# Altium PCB CSM32RV20_QFN_3V5V_V1.1.PcbDoc
Units mm, origin at the board's own origin, x right, y up, seen from the top; angles counter-clockwise.
Board outline 67.31 x 29.21 mm, 2 copper layers (Top Layer, Bottom Layer); 39 components, 51 nets, 196 pads, 173 vias.
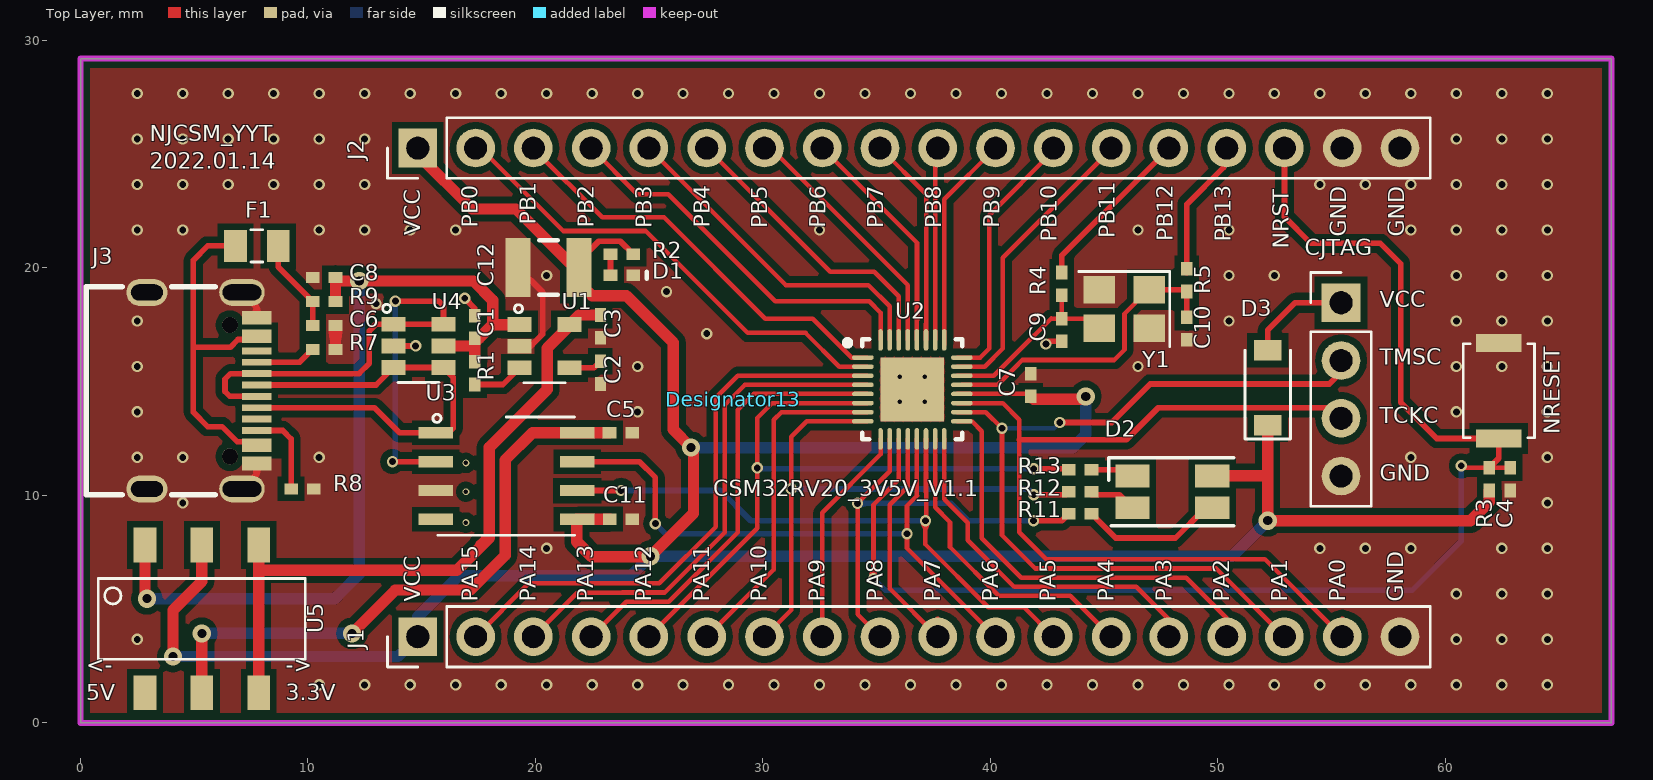
[diagram p0: Top Layer view]
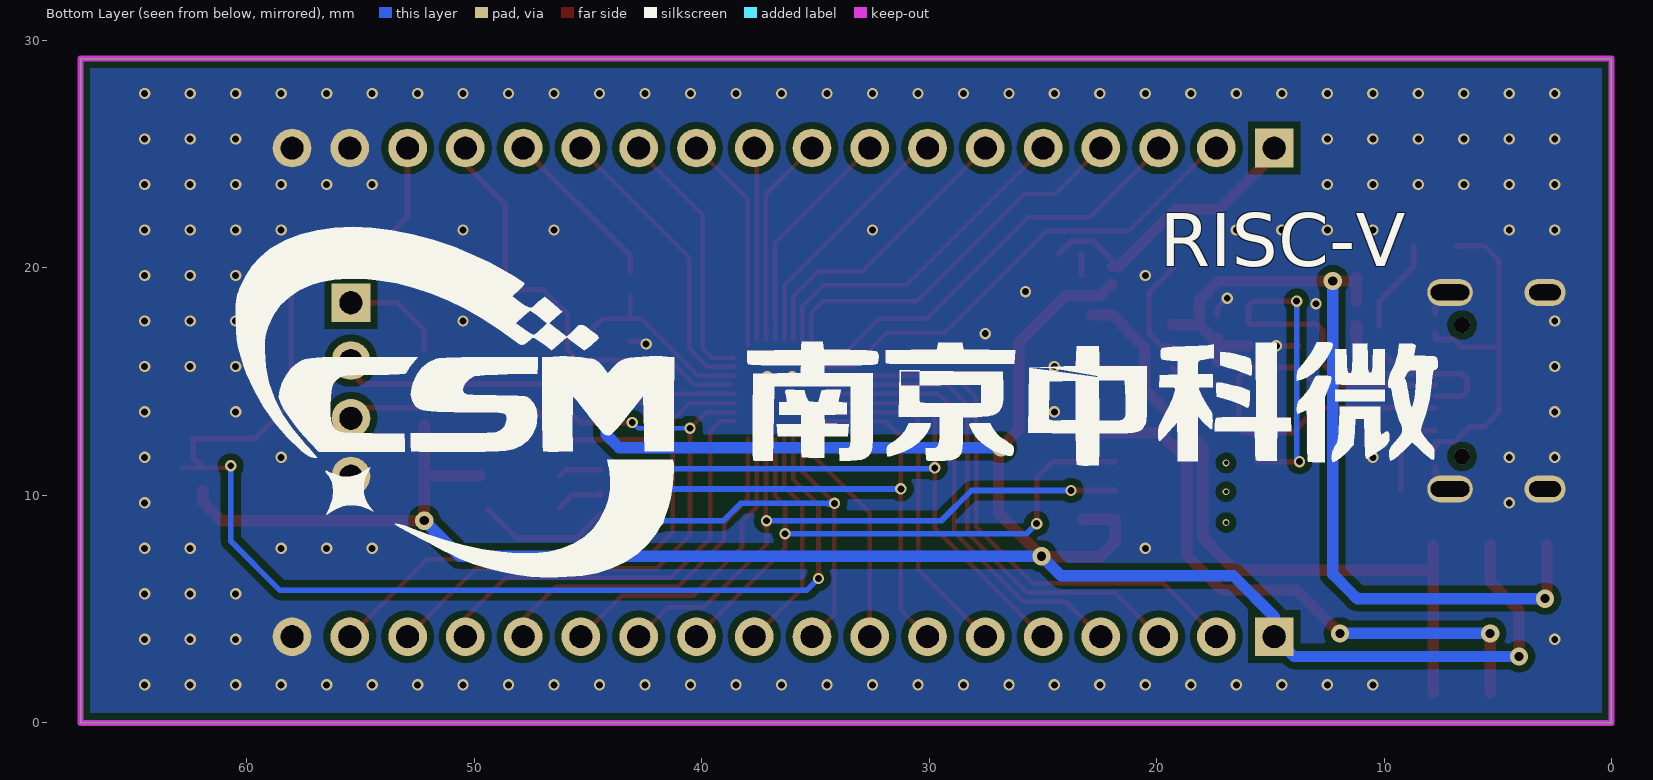
[diagram p1: Bottom Layer view, seen from below]

## Layer stack, top to bottom
Top Solder: solder mask 0.0102, Solder Resist, Dk 3.5
Top Layer: signal copper 0.0356
Dielectric1: dielectric 0.32, FR-4, Dk 4.8
Bottom Layer: signal copper 0.0356
Bottom Solder: solder mask 0.0102, Solder Resist, Dk 3.5

## Board outline
0,0 67.31,0 67.31,29.21 0,29.21

## Design rules (kind name [scope] priority, off if disabled: settings)
Clearance [All] p1: gap=0.2 ignorepadtopadclearanceinfootprint=TRUE except(0: Arc-Hole Track-Hole SMDPad-Hole THPad-Hole Via-Hole Fill-Hole Poly-Hole Region-Hole Text-Hole; 0.3: Arc-Fill Arc-Poly Arc-Region Track-Fill Track-Poly Track-Region SMDPad-Fill SMDPad-Poly SMDPad-Region THPad-Fill THPad-Poly THPad-Region Via-Fill Via-Poly Via-Region Fill-Fill Fill-Poly Fill-Region Poly-Poly Poly-Region Region-Region)
ComponentClearance [All] p1: gap=0.127 collisioncheckmode=3 verticalgap=0.254 showdistances=FALSE
DiffPairsRouting [All] p1: maxlimit=0.254 minlimit=0.15 mostfreqgap=0.254 toplayer_minwidth=0.2 toplayer_maxwidth=1 toplayer_prefwidth=0.2 bottomlayer_minwidth=0.2 bottomlayer_maxwidth=1 bottomlayer_prefwidth=0.2 maxuncoupledlength=12.7
MinimumSolderMaskSliver [All] p1: minsoldermaskwidth=0
PolygonConnect [All] p1: connectstyle=Direct reliefconductorwidth=0.254 reliefentries=4 polygonreliefangle="90 Angle" airgapwidth=0.254
RoutingCorners [All] p1: cornerstyle=45-Degree minsetback=0.2 maxsetback=2.54
RoutingVias [All] p1: holewidth=0.711 width=1.27 viastyle="Through Hole" minholewidth=0.2 minwidth=0.3 maxholewidth=0.711 maxwidth=1.27
SilkToSilkClearance [All] p1: silktosilkclearance=0.01
SilkToSolderMaskClearance [IsPad] p1: minsilkscreentomaskgap=0.01 clearancetoexposedcopper=TRUE
SolderMaskExpansion [All] p1: expansion=0.102
UnRoutedNet [All] p1: checkbadconnections=TRUE
Width [All] p1: maxlimit=0.5 minlimit=0.2 preferedwidth=0.25 minimp=50.000000 maximp=50.000000 favimp=50.000000
23 further rules are at their usual default settings.

## Components (designator, comment, footprint, x,y, rotation, side; value= is the part's Value field where it differs from the comment)
C1 "1uF" 0402 17.336,17.408 r90 top
C2 "22nF" 0402 22.86,15.4 r270 top
C3 "1uF" 0402 22.86,17.432 r270 top
C4 "0.1uF" 0402 62.865,10.717 r270 top
C5 "0.1uF" 0402 23.757,12.757 r180 top
C6 "10uF" 0402 10.713,17.472 r180 top
C7 "4.7uF" 0402 41.783,14.855 r90 top
C8 "0.1uF" 0402 10.713,19.58 r0 top
C9 "15pF" 0402 43.144,17.276 r90 top
C10 "15pF" 0402 48.641,17.339 r90 top
C11 "0.1uF" 0402 23.763,8.947 r0 top
C12 "100uF" C1210 20.574,20.027 r180 top
CJTAG "Conn_01x04" PINHEADER_1X04_P2.54MM_VERTICAL -90.503,114.484 r0 top (schematic designator CJTAG1)
D1 "LED" "LED 0402" 23.799,19.676 r180 top
D2 "LED_ARGB" LED_RGB_1210 48.006,10.16 r0 top
D3 "B0520W" D_SOD-123 52.197,14.731 r0 top
Designator13 "Comment" LOGO-L 28.702,14.224 r180 top
F1 "Fuse" FUSE_0805_2012METRIC 105.543,-72.373 r180 top
J1 "Conn_01x18" PINHEADER_1X18_P2.54MM_VERTICAL -90.17,114.3 r0 top locked
J2 "Conn_01x18" PINHEADER_1X18_P2.54MM_VERTICAL -90.17,135.781 r0 top locked
J3 "USB_C_Receptacle_USB2.0" USB-C-SMD_KH-TYPE-C-16P 5.334,14.605 r270 top
NRESET "SW_Push" SW_PUSH_SPST_NO_ALPS_SKRK -90.17,114.3 r0 top (schematic designator NRESET1)
R1 "2k" 0402 17.336,15.381 r270 top
R2 "1k" 0402 23.799,20.6 r180 top
R3 "10k" 0402 61.938,10.717 r90 top
R4 "0R" 0402 43.144,19.303 r270 top
R5 "0R" 0402 48.641,19.464 r270 top
R7 "5.1k" 0402 10.713,16.418 r0 top
R8 "5.1k" 0402 9.759,10.285 r0 top
R9 "10R" 0402 10.713,18.526 r180 top
R11 "820R" 0402 43.95,9.196 r180 top
R12 "820R" 0402 43.95,10.16 r180 top
R13 "2.2k" 0402 43.95,11.124 r180 top
U1 "RT9193-33GB" SOT-23-5 -90.17,114.3 r0 top locked
U2 "CSM32RV20_QFN32" CSM32RV20_QFN32 36.573,14.662 r0 top
U3 "CH340N" SOP-8-1EP_6X5MM_P1.27MM -90.17,114.3 r0 top
U4 "USBLC6-2SC6" SOT-23-6 -90.17,114.3 r0 top
U5 "Slide_Switch" SLIDE_SWITCH_SMD -90.17,114.3 r0 top locked
Y1 "32MHZ" CRYSTAL_SMD_ABRACON_ABM8G-4PIN_3.2X2.5MM -90.17,114.3 r0 top

## Footprints (in the part's own frame and the unit in brackets; to place one, negate y for a bottom-side part, rotate by r counter-clockwise, add the part's x,y. Pads: shape width x height; smd on the part's side, far side on the other; paste and mask are expansions set on the pad)
0402 [mm] "Chip Capacitor, Body 1.0x0.5mm, IPC High Density"
  rect 0.6x0.5 smd: 1(-0.5,0) 2(0.5,0)
  body extent -0.55,-0.3 0.55,0.3, height 1.3
C1210 [mm] "Chip Capacitor, Body 3.2x2.5mm, IPC High Density"
  rect 1.1x2.6 smd: 1(-1.35,0) 2(1.35,0)
  silkscreen extent -0.4,-1.2 0.4,1.2, body extent -1.7,-1.35 1.7,1.35, height 1.3
CRYSTAL_SMD_ABRACON_ABM8G-4PIN_3.2X2.5MM [mm]
  rect 1.4x1.2 smd: 1(137.16,-95.25) 2(134.96,-95.25) 3(134.96,-96.95) 4(137.16,-96.95)
  silkscreen extent 134.06,-97.75 138.06,-94.45
CSM32RV20_QFN32 [mm]
  oval 0.95x0.2 smd: 1(-2.175,1.4) 2(-2.175,1) 3(-2.175,0.6) 4(-2.175,0.2) 5(-2.175,-0.2) 6(-2.175,-0.6) 7(-2.175,-1) 8(-2.175,-1.4) 17(2.175,-1.4) 18(2.175,-1) 19(2.175,-0.6) 20(2.175,-0.2) 21(2.175,0.2) 22(2.175,0.6) 23(2.175,1) 24(2.175,1.4)
  oval 0.2x0.95 smd: 9(-1.4,-2.175) 10(-1,-2.175) 11(-0.6,-2.175) 12(-0.2,-2.175) 13(0.2,-2.175) 14(0.6,-2.175) 15(1,-2.175) 16(1.4,-2.175) 25(1.4,2.175) 26(1,2.175) 27(0.6,2.175) 28(0.2,2.175) 29(-0.2,2.175) 30(-0.6,2.175) 31(-1,2.175) 32(-1.4,2.175)
  rect 2.8x2.8 smd: 33(0,0)
  silkscreen extent -2.97,-2.2 2.2,2.2, body extent -2.05,-2.05 2.05,2.05, height 0.8
D_SOD-123 [mm]
  rect 1.2x0.9 smd: 1(0,-1.651) 2(0,1.651)
  round 0 smd: 1(0,-1.649) 2(0,1.651)
  silkscreen extent -1,-2.25 1,1.65
FUSE_0805_2012METRIC [mm]
  rect 1x1.4 smd: 1(96.852,-93.345) 2(98.727,-93.345)
  round 0 smd: roundrect(96.852,-93.345) roundrect(98.727,-93.345)
  silkscreen extent 97.53,-94.05 98.05,-92.63
"LED 0402" [mm] "Chip Inductor, Body 1.0x0.5mm, IPC High Density"
  rect 0.6x0.5 smd: 1(0.5,0) 2(-0.5,0)
  silkscreen extent -1.1,-0.15 -1.1,0.15, body extent -0.55,-0.3 0.55,0.3, height 0.55
LED_RGB_1210 [mm]
  rect 1.5x1 smd: 1(1.75,0.7) 2(1.75,-0.7) 3(-1.75,-0.7) 4(-1.75,0.7)
  silkscreen extent -2.8,-1.5 2.7,1.5
LOGO-L [mm]
PINHEADER_1X04_P2.54MM_VERTICAL [mm]
  rect 1.7x1.7 hole 1: 1(145.923,-96.012)
  round 1.7 hole 1: 2(145.923,-98.552) 3(145.923,-101.092) 4(145.923,-103.632)
  silkscreen extent 144.59,-104.96 147.25,-94.68
PINHEADER_1X18_P2.54MM_VERTICAL [mm]
  rect 1.7x1.7 hole 1: 1(105,-110.508)
  round 1.7 hole 1: 2(107.54,-110.508) 3(110.08,-110.508) 4(112.62,-110.508) 5(115.16,-110.508) 6(117.7,-110.508) 7(120.24,-110.508) 8(122.78,-110.508) 9(125.32,-110.508) 10(127.86,-110.508) 11(130.4,-110.508) 12(132.94,-110.508) 13(135.48,-110.508) 14(138.02,-110.508) 15(140.56,-110.508) 16(143.1,-110.508) 17(145.64,-110.508) 18(148.18,-110.508)
  silkscreen extent 103.67,-111.84 149.51,-109.18
SLIDE_SWITCH_SMD [mm]
  rect 1x1.524 smd: 1(93.004,-106.478) 2(95.504,-106.478) 3(98.004,-106.478) 4(93.004,-112.978) 5(95.504,-112.978) 6(98.004,-112.978)
  silkscreen extent 90.95,-111.5 100.05,-107.95
SOP-8-1EP_6X5MM_P1.27MM [mm] "CH340N"
  rect 1.5x0.5 smd: 1(105.788,-101.543) 2(105.788,-102.813) 3(105.788,-104.083) 4(105.788,-105.353) 5(112.011,-105.353) 6(112.011,-104.083) 7(112.011,-102.813) 8(112.011,-101.543)
  round 0 smd: 1(105.788,-101.543) 2(105.788,-102.813) 3(105.788,-104.083) 4(105.788,-105.353) 5(111.988,-105.353) 6(111.988,-104.083) 7(111.988,-102.813) 8(111.988,-101.543)
  silkscreen extent 105.66,-106.05 111.89,-100.73
SOT-23-5 [mm]
  rect 1.06x0.65 smd: 1(109.469,-96.789) 2(109.469,-97.739) 3(109.469,-98.689) 4(111.669,-98.689) 5(111.669,-96.789)
  silkscreen extent 109.25,-99.35 111.47,-95.91
SOT-23-6 [mm]
  rect 1.06x0.65 smd: 1(103.929,-96.776) 2(103.929,-97.726) 3(103.929,-98.676) 4(106.129,-98.676) 5(106.129,-97.726) 6(106.129,-96.776)
  silkscreen extent 103.45,-99.34 105.93,-95.9
SW_PUSH_SPST_NO_ALPS_SKRK [mm]
  rect 2x0.8 smd: 1(152.527,-97.595) 2(152.527,-101.795)
  round 0 smd: roundrect(152.527,-101.795) roundrect(152.527,-97.595)
  silkscreen extent 150.96,-101.76 154.1,-97.62
USB-C-SMD_KH-TYPE-C-16P [mm]
  rect 0.3x1.3 smd: A1(-3.35,2.415) A4(-2.55,2.415) A5(-1.25,2.415) A6(-0.25,2.415) A7(0.25,2.415) A8(1.25,2.415) A9(2.55,2.415) A12(3.35,2.415) B1(3.05,2.415) B4(2.25,2.415) B5(1.75,2.415) B6(0.75,2.415) B7(-0.75,2.415) B8(-1.75,2.415) B9(-2.25,2.415) B12(-3.05,2.415)
  oval 1.2x2 hole 0.7 slot 1.7 at 90 deg: S1(-4.32,1.765) S1(4.32,1.765)
  oval 1.2x1.8 hole 0.7 slot 1.4 at 90 deg: S1(-4.32,-2.415) S1(4.32,-2.415)
  round 0.7 hole 0.7 unplated: ""(-2.89,1.235) ""(2.89,1.235)
  silkscreen extent -4.57,-5.08 4.57,0.57

## Part data
C7: library part 0.1uF
D3: Datasheet=http://www.jameco.com/Jameco/Products/ProdDS/1538777.pdf
J3: Datasheet=https://www.usb.org/sites/default/files/documents/usb_type-c.zip
U4: Datasheet=https://www.st.com/resource/en/datasheet/usblc6-2.pdf

## Via types
v1: diameter 0.5, hole 0.3, Top Layer to Bottom Layer, tented both sides, 151 vias
v2: diameter 0.8, hole 0.4, Top Layer to Bottom Layer, tented both sides, 9 vias
v3: diameter 0.5, hole 0.3, Top Layer to Bottom Layer, 6 vias
v4: diameter 0.5, hole 0.2, Top Layer to Bottom Layer, 4 vias
v5: diameter 0.3, hole 0.2, Top Layer to Bottom Layer, tented both sides, 3 vias

## Nets (pads, with @x,y where several pads share a name; then routed paths per layer and width w, separated by ;. In a path a pad name is that pad's centre, name@x,y a point inside that pad or via, vN(x,y) a via of type N, cw(c..) or ccw(c..) an arc to the next point about the centre after c; other vN are vias at no path point)
+3.3V: C7.1 C11.1 C12.1 D2.1 D3.1 J1.1 J2.1 R2.1 R3.1 U2.20 U3.5 U5.2 | length 133.1
  Top Layer w0.2: U2.20@38.548,14.462 41.676,14.462 C7.1
  Top Layer w0.254: C12.1 21.924,20.08 21.924,20.32 22.781,21.177 23.735,21.177 24.299,20.612 R2.1
  Top Layer w0.5: v2(4.064,2.921) 4.064,4.953 5.334,6.223 U5.2 ; J2.1@14.83,24.734 14.83,24.992 17.231,22.592 19.146,22.592 21.657,20.08 C12.1@21.924,20.08 ; U3.5@21.818,8.947 21.818,7.963 22.479,7.302 25.032,7.302 v2(25.058,7.327) 25.91,8.18 26.95,9.22 26.95,12.01 v2(26.846,12.114) 26.06,12.9 26.06,16.72 23.994,18.787 22.488,18.787 C12.1@21.977,19.298 ; U3.5@21.841,8.947 C11.1 ; C7.1 41.914,14.224 44.069,14.224 v2(44.196,14.351) ; D2.1 52.135,10.86 52.197,10.922 ; D3.1@52.197,13.08 52.197,10.922 ; R3.1 61.938,9.715 61.112,8.89 v2(52.197,8.89) 52.197,10.922
  Bottom Layer w0.5: v2(4.064,2.921) 13.959,2.921 J1.1 14.83,4.67 16.622,6.462 24.192,6.462 v2(25.058,7.327) 50.634,7.327 v2(52.197,8.89) ; v2(26.846,12.114) 26.856,12.104 43.634,12.104 44.196,12.666 v2(44.196,14.351)
+5V: C1.1 C8.2 R1.1 R9.1 U1.1 U4.5 U5.1 | length 40.1
  Top Layer w0.5: U5.1 2.834,5.548 v2(2.921,5.461) ; R9.1 C8.2 11.363,19.431 v2(12.255,19.431) 17.272,19.431 18.125,18.578 18.125,17.511 ; U4.5 17.273,16.573 17.336,16.51 ; R1.1 17.336,16.51 ; U1.1 18.125,17.511 ; 17.336,16.51 C1.1 17.522,16.908 18.125,17.511
  Bottom Layer w0.5: v2(2.921,5.461) 11.176,5.461 11.493,5.779 ; 12.192,6.477 11.493,5.779 ; v2(12.255,19.431) 12.255,6.54 11.493,5.779
GND: C1.2 C2.2 C3.2 C4.2 C5.1 C6.1 C7.2 C8.1 C9.1 C10.1 C11.2 C12.2 CJTAG.4 D1.2 J1.18 J2.17 J2.18 J3.A1 J3.A12 J3.B1 J3.B12 J3.S1 NRESET.1 R7.2 R8.2 U1.2 U2.33 U3.3 U4.2 Y1.2 Y1.4 | length 10.9
  Top Layer w0.25: J3.S1@7.099,10.285 7.749,10.935 J3.A12 ; J3.S1@7.099,18.925 7.749,18.275 J3.A1 ; U4.2 v3(14.732,16.573) ; v3(16.891,18.669) 17.336,18.224 C1.2 ; C12.2 20.32,18.931 20.32,17.091 19.79,16.561 U1.2 ; v3(42.441,16.66) 42.557,16.776 C9.1
  Top Layer w0.5: R7.2 11.176,16.455 11.213,16.492 11.213,16.839 11.213,17.397 11.176,17.435 C6.1
  other v1: 10.491,1.672 12.491,1.672 14.491,1.672 16.491,1.672 18.491,1.672 20.491,1.672 22.491,1.672 24.491,1.672 26.491,1.672 28.491,1.672 30.491,1.672 32.491,1.672 34.491,1.672 36.491,1.672 38.491,1.672 40.491,1.672 42.491,1.672 44.491,1.672 46.491,1.672 48.491,1.672 50.491,1.672 52.491,1.672 54.491,1.672 56.491,1.672 58.491,1.672 60.491,1.672 62.491,1.672 64.491,1.672 2.491,3.672 60.491,3.672 62.491,3.672 64.491,3.672 60.491,5.672 62.491,5.672 64.491,5.672 20.491,7.672 54.491,7.672 56.491,7.672 58.491,7.672 62.491,7.672 64.491,7.672 4.491,9.672 64.491,9.672 2.491,11.672 4.491,11.672 10.491,11.672 58.491,11.672 64.491,11.672 2.491,13.672 24.491,13.672 60.491,13.672 64.491,13.672 2.491,15.672 24.491,15.672 46.491,15.672 60.491,15.672 62.491,15.672 64.491,15.672 2.491,17.672 50.491,17.672 60.491,17.672 62.491,17.672 64.491,17.672 20.491,19.672 50.491,19.672 52.491,19.672 60.491,19.672 62.491,19.672 64.491,19.672 2.491,21.672 4.491,21.672 10.491,21.672 12.491,21.672 14.491,21.672 16.491,21.672 32.491,21.672 46.491,21.672 50.491,21.672 58.491,21.672 60.491,21.672 62.491,21.672 64.491,21.672 2.491,23.672 4.491,23.672 6.491,23.672 8.491,23.672 10.491,23.672 12.491,23.672 54.491,23.672 56.491,23.672 58.491,23.672 60.491,23.672 62.491,23.672 64.491,23.672 2.491,25.672 4.491,25.672 6.491,25.672 8.491,25.672 10.491,25.672 12.491,25.672 60.491,25.672 62.491,25.672 64.491,25.672 2.491,27.672 4.491,27.672 6.491,27.672 8.491,27.672 10.491,27.672 12.491,27.672 14.491,27.672 16.491,27.672 18.491,27.672 20.491,27.672 22.491,27.672 24.491,27.672 26.491,27.672 28.491,27.672 30.491,27.672 32.491,27.672 34.491,27.672 36.491,27.672 38.491,27.672 40.491,27.672 42.491,27.672 44.491,27.672 46.491,27.672 48.491,27.672 50.491,27.672 52.491,27.672 54.491,27.672 56.491,27.672 58.491,27.672 60.491,27.672 62.491,27.672 64.491,27.672
  other v3: 27.53,17.117 12.991,18.427 25.761,18.964
  other v4: 36.023,14.112 37.123,14.112 36.023,15.212 37.123,15.212
LDO_OUT: C3.1 U1.5 U5.3 U5.6 | length 30.1
  Top Layer w0.5: U5.6 7.834,6.707 ; U5.3 7.834,6.707 ; 17.601,7.822 17.969,8.19 ; C3.1 21.92,17.932 U1.5 21.5,17.458 20.52,16.478 20.52,14.664 17.969,12.113 17.969,8.19 ; 7.834,6.707 16.55,6.707 17.969,8.126 17.969,8.19
NetC2_1: C2.1 U1.4 | length 1.5
  Top Layer w0.25: U1.4 22.571,15.611 C2.1
NetC6_2: C6.2 F1.1 R9.2 | length 4.1
  Top Layer w0.25: F1.1 8.691,20.048 R9.2 C6.2
NetC9_2: C9.2 R4.2 U2.22 Y1.3 | length 8.9
  Top Layer w0.2: U2.22@38.548,15.262 40.154,15.262 40.833,15.941 40.833,15.945 41.243,16.355 41.247,16.355 42.672,17.78 42.676,17.776 C9.2 ; R4.2 C9.2 ; Y1.3 44.364,17.776 C9.2
  Top Layer w0.25: Y1.3@44.51,17.63 Y1.3
NetC10_2: C10.2 R5.2 U2.21 Y1.1 | length 13.8
  Top Layer w0.2: U2.21 40.32,14.862 41.233,15.775 41.233,15.779 41.409,15.955 45.443,15.955 45.9,16.412 45.9,17.984 46.966,19.05 Y1.1
  Top Layer w0.25: Y1.1 48.41,19.05 48.641,18.819 C10.2@48.641,17.653
NetCJTAG1_1: CJTAG.1 D3.2 | length 4.6
  Top Layer w0.25: D3.2@52.197,16.382 52.197,17.272 53.397,18.472 CJTAG.1
NetD1_1: D1.1 R2.2 | length 0.9
  Top Layer w0.25: D1.1 R2.2
NetD2_2: D2.2 R11.1 | length 5.9
  Top Layer w0.25: R11.1 45.517,8.129 48.137,8.129 D2.2@49.403,9.395
NetD2_3: D2.3 R12.1 | length 2.2
  Top Layer w0.25: R12.1 44.45,10.035 45.681,10.035 D2.3
NetD2_4: D2.4 R13.1 | length 1.9
  Top Layer w0.25: R13.1 45.992,11.124 D2.4
NetF1_2: F1.2 J3.A4 J3.A9 J3.B4 J3.B9 | length 15.7
  Top Layer w0.25: F1.2@6.699,20.972 5.588,20.972 4.953,20.337 4.953,16.51 ; J3.A9 J3.B4 6.895,12.355 6.223,13.027 5.588,13.027 4.953,13.662 4.953,16.51 ; J3.A4 J3.B9 6.928,16.855 6.583,16.51 4.953,16.51
  Top Layer w0.254: F1.2@6.699,20.972 F1.2
NetJ3_A5: J3.A5 R7.1 | length 2.6
  Top Layer w0.25: J3.A5 9.632,15.855 R7.1@10.16,16.383
NetJ3_B5: J3.B5 R8.1 | length 3.9
  Top Layer w0.25: J3.B5 8.89,12.855 9.259,12.486 R8.1
NetR1_2: R1.2 U1.3 | length 2.3
  Top Layer w0.25: R1.2 18.569,14.881 U1.3
NRESET: C4.1 J2.16 NRESET.2 R3.2 U2.11 | length 60.4
  Top Layer w0.2: v1(34.863,6.35) 34.863,9.59 35.973,10.7 U2.11 ; v1(60.706,11.303) 60.792,11.217 R3.2 C4.1
  Top Layer w0.25: J2.16@52.93,25.146 52.93,22.254 54.102,21.082 57.15,21.082 58.039,20.193 58.039,14.097 59.631,12.505 NRESET.2 62.357,11.636 R3.2
  Bottom Layer w0.25: v1(34.863,6.35) 35.385,5.828 58.533,5.828 60.706,8.001 v1(60.706,11.303)
PA0: CJTAG.3 J1.17 U2.19 | length 40.2
  Top Layer w0.2: U2.19@38.548,14.062 40.548,14.062 41.275,13.335 41.275,12.446 41.275,8.379 42.466,7.188 52.074,7.188 J1.17
  Top Layer w0.25: 41.275,12.446 45.974,12.446 47.385,13.857 55.104,13.857 CJTAG.3@55.753,13.208 ; J1.17 J1.17@55.47,4.554
PA1: CJTAG.2 J1.16 U2.18 | length 38
  Top Layer w0.2: U2.18@38.548,13.662 39.805,13.662 v1(40.513,12.954) 40.513,8.255 41.98,6.788 49.934,6.788 J1.16
  Top Layer w0.25: v1(43.053,13.208) 45.339,13.208 47.029,14.898 54.903,14.898 CJTAG.2@55.753,15.748 ; J1.16 J1.16@53.322,3.792
  Bottom Layer w0.2: v1(40.513,12.954) 42.799,12.954 v1(43.053,13.208)
PA2: J1.15 U2.17 | length 19
  Top Layer w0.2: U2.17@38.548,13.262 39.192,13.262 39.627,12.827 39.627,8.125 41.364,6.388 48.607,6.388 50.39,4.605 J1.15
PA3: J1.14 U2.16 | length 15.9
  Top Layer w0.2: U2.16 37.976,12.484 37.976,9.84 39.008,8.807 39.008,8.022 41.042,5.988 46.416,5.988 47.85,4.554 J1.14
PA4: J1.13 U2.15 | length 13.7
  Top Layer w0.2: U2.15 37.573,10.313 37.576,10.31 37.576,9.478 38.227,8.826 38.227,7.732 40.371,5.588 43.514,5.588 J1.13
PA5: J1.12 U2.14 U3.6 | length 27.8
  Top Layer w0.2: U2.14 37.173,10.147 37.176,10.145 37.176,8.918 v1(37.148,8.89) 37.148,7.846 39.914,5.08 41.482,5.08 J1.12
  Top Layer w0.25: U3.6@21.818,10.217 v1(23.763,10.217)
  Bottom Layer w0.25: v1(23.763,10.217) 28.137,10.217 29.464,8.89 v1(37.148,8.89)
PA6: J1.11 U2.13 U3.7 | length 27.5
  Top Layer w0.2: U2.13 36.773,9.982 36.776,9.979 36.336,9.539 v1(36.336,8.315) 36.336,7.686 J1.11
  Top Layer w0.25: U3.7@21.818,11.487 24.568,11.487 25.273,10.782 v1(25.273,8.763)
  Bottom Layer w0.25: v1(25.273,8.763) 25.721,8.315 v1(36.336,8.315)
PA7: J1.10 U2.12 | length 10.7
  Top Layer w0.2: U2.12 36.373,10.387 35.576,9.59 35.576,5.906 J1.10
  Top Layer w0.25: J1.10 J1.10@37.69,4.554
PA8: J1.9 R11.2 U2.10 | length 19.4
  Top Layer w0.2: J1.9 34.163,4.779 v1(34.163,9.652) 35.573,11.062 U2.10
  Top Layer w0.25: v1(41.9,8.89) 43.144,8.89 R11.2
  Bottom Layer w0.25: v1(34.163,9.652) 38.282,9.652 38.953,8.981 39.044,8.89 v1(41.9,8.89)
PA9: J1.8 U2.9 | length 9.8
  Top Layer w0.2: J1.8 32.61,9.242 35.173,11.805 U2.9
PA10: J1.7 R12.2 U2.8 | length 25.3
  Top Layer w0.2: J1.7 31.242,4.964 v1(31.242,10.287) 31.242,12.573 31.931,13.262 U2.8@34.598,13.262
  Top Layer w0.25: v1(41.91,10.033) 43.323,10.033 R12.2
  Bottom Layer w0.25: v1(31.242,10.287) 41.656,10.287 v1(41.91,10.033)
PA11: J1.6 U2.7 | length 15
  Top Layer w0.2: J1.6 30.48,6.742 30.48,13.324 30.818,13.662 U2.7@34.598,13.662
PA12: J1.5 R13.2 U2.6 | length 30.8
  Top Layer w0.2: J1.5 29.753,8.555 v1(29.753,11.211) 29.753,13.405 30.41,14.062 U2.6@34.598,14.062
  Top Layer w0.25: J1.5 J1.5@24.99,4.126 ; v1(41.91,11.176) 43.398,11.176 R13.2
  Bottom Layer w0.25: v1(29.753,11.211) 29.788,11.176 v1(41.91,11.176)
PA13: J1.4 U2.5 | length 19.7
  Top Layer w0.2: J1.4 23.992,5.334 25.856,5.334 28.893,8.371 28.893,13.764 29.591,14.462 U2.5@34.598,14.462
PA14: J1.3 U2.4 | length 22.6
  Top Layer w0.2: J1.3 21.844,5.726 23.818,5.726 23.826,5.734 25.69,5.734 28.326,8.37 28.326,13.975 29.213,14.862 U2.4@34.598,14.862
PA15: J1.2 U2.3 | length 25.4
  Top Layer w0.2: J1.2 19.712,6.134 25.446,6.134 27.926,8.614 27.926,14.296 28.893,15.262 U2.3@34.598,15.262
  Top Layer w0.25: J1.2 J1.2@17.457,3.879
PB0: J2.2 U2.2 | length 21.2
  Top Layer w0.2: J2.2 17.572,25.273 21.218,21.627 24.855,21.627 29.337,17.145 31.877,17.145 33.36,15.662 U2.2@34.598,15.662
PB1: J2.3 U2.1 | length 18.5
  Top Layer w0.2: J2.3 19.91,25.25 22.935,22.225 25.654,22.225 30.103,17.776 32.199,17.776 33.913,16.062 U2.1@34.598,16.062
PB2: J2.4 U2.32 | length 16.9
  Top Layer w0.2: J2.4 24.482,23.241 25.838,23.241 30.537,18.542 34.671,18.542 35.173,18.04 U2.32
PB3: J2.5 U2.31 | length 14.9
  Top Layer w0.2: J2.5 31.013,19.25 34.641,19.25 35.576,18.315 35.576,18.209 35.573,18.206 U2.31
PB4: J2.6 U2.30 | length 13.1
  Top Layer w0.2: J2.6 32.963,19.84 34.897,19.84 35.976,18.761 35.976,18.043 35.973,18.04 U2.30
PB5: J2.7 U2.29 | length 11.2
  Top Layer w0.2: J2.7 30.353,25.273 36.376,19.25 36.376,17.878 36.373,17.875 U2.29
PB6: J2.8 U2.28 | length 10.2
  Top Layer w0.2: J2.8 36.776,21.107 36.776,19.416 ; U2.28 36.773,17.709 36.776,17.712 36.776,19.416
PB7: J2.9 U2.27 | length 9.3
  Top Layer w0.2: J2.9 37.176,23.247 37.176,19.581 37.176,17.546 37.173,17.543 U2.27
PB8: J2.10 U2.26 | length 8.5
  Top Layer w0.2: U2.26 37.573,17.378 37.576,17.381 37.576,19.747 37.576,23.413 37.573,23.415 37.573,25.156 J2.10
PB9: J2.11 U2.25 | length 9.6
  Top Layer w0.2: U2.25@37.973,16.637 37.976,16.64 37.976,19.913 37.976,23.019 J2.11
PB10: J2.12 U2.24 | length 11.4
  Top Layer w0.2: U2.24@38.548,16.062 39.557,16.062 39.557,16.066 39.951,16.46 39.951,22.327 J2.12@42.77,25.146
PB11: J2.13 U2.23 | length 13.1
  Top Layer w0.2: U2.23@38.548,15.662 39.75,15.662 40.548,16.46 40.548,20.457 45.31,25.219 J2.13
PB12: J2.14 R4.1 | length 7.4
  Top Layer w0.25: R4.1 43.144,20.554 47.85,25.26 J2.14
PB13: J2.15 R5.1 | length 6.2
  Top Layer w0.25: R5.1@48.641,19.789 48.641,22.805 50.256,24.42 50.256,25.139 J2.15
USB_D+: J3.A6 J3.B6 U3.1 U4.3 U4.4 | length 20.5
  Top Layer w0.25: J3.B6 12.929,13.855 14.027,12.757 16.186,12.757 16.383,12.954 16.383,15.2 U4.4 U4.3 12.991,14.855 J3.A6@7.749,14.855
USB_D-: J3.A7 J3.B7 U3.2 U4.1 U4.6 | length 26.3
  Top Layer w0.25: J3.A7 6.565,14.355 6.35,14.57 6.35,15.113 6.592,15.355 J3.B7 12.244,15.355 12.693,15.804 12.693,17.237 12.979,17.523 U4.1 U4.6 ; v1(13.716,11.487) U3.2@15.618,11.487 ; v1(13.843,18.542) 15.748,18.542 15.959,18.331 U4.6 ; 15.179,17.523 U4.6
  Bottom Layer w0.25: v1(13.716,11.487) 13.843,11.614 v1(13.843,18.542)
V3: C5.2 U3.8 U5.5 | length 26.3
  Top Layer w0.5: U5.5 5.334,3.755 v2@5.35,3.771 ; v2(11.938,3.937) 13.843,5.842 17.145,5.842 18.669,7.366 18.669,11.557 19.869,12.757 U3.8@21.818,12.757 ; U3.8@21.841,12.757 C5.2
  Bottom Layer w0.5: v2@5.516,3.937 v2(11.938,3.937)
  other v2: 5.334,3.937
pads on no net: F1.roundrect J3. J3.A8 J3.B8 NRESET.roundrect U3.4 U5.4
copper on no net:
  other v5: 16.946,8.807 16.946,10.16 16.946,11.43

## Polygon pours and split planes (outlines as drawn)
GND on Bottom Layer "Bottom Layer-GND" (solid, pour order 0): 67.056,0.254 0.254,0.254 0.254,28.956 67.056,28.956
GND on Top Layer "Top Layer-GND" (solid, pour order 2): 67.056,0.254 0.254,0.254 0.254,28.956 67.056,28.956

## Keep-outs
Keep-Out Layer:
  the board outline again, w0.254

## Silkscreen, mask and mechanical layers (free items; w line width, h text height)
Top Overlay:
  text "NJCSM_YYT / 2022.01.14" at 3.048,24.13 h1.2
  text "PB1" at 20.261,21.906 h1.2 r90
  text "PB0" at 17.715,21.76 h1.2 r90
  text "PB2" at 22.806,21.765 h1.2 r90
  text "PB3" at 25.352,21.757 h1.2 r90
  text "PB4" at 27.897,21.761 h1.2 r90
  text "PB7" at 35.534,21.757 h1.2 r90
  text "PB8" at 38.079,21.756 h1.2 r90
  text "PB5" at 30.443,21.752 h1.2 r90
  text "PB6" at 32.99,21.744 h1.2 r89
  text "PB9" at 40.627,21.743 h1.2 r89
  text "VCC" at 15.169,21.435 h1.2 r90
  text "GND" at 55.898,21.383 h1.2 r90
  text "GND" at 58.444,21.383 h1.2 r90
  text "PB11" at 45.716,21.309 h1.2 r90
  text "PB10" at 43.171,21.162 h1.2 r90
  text "PB12" at 48.262,21.168 h1.2 r90
  text "PB13" at 50.807,21.16 h1.2 r90
  text "NRST" at 53.353,20.837 h1.2 r90
  text "VCC" at 57.125,18.034 h1.2
  text "TMSC" at 57.125,15.494 h1.2
  text "TCKC" at 57.125,12.942 h1.2
  text "GND" at 57.125,10.402 h1.2
  text "CSM32RV20_3V5V_V1.1" at 27.813,9.714 h1.2
  text "VCC" at 15.179,5.334 h1.2 r90
  text "PA15" at 17.711,5.333 h1.2 r90
  text "PA14" at 20.253,5.333 h1.2 r90
  text "PA13" at 22.794,5.333 h1.2 r90
  text "PA12" at 25.336,5.333 h1.2 r90
  text "PA11" at 27.878,5.333 h1.2 r90
  text "PA10" at 30.42,5.333 h1.2 r90
  text "PA9" at 32.961,5.333 h1.2 r90
  text "PA8" at 35.503,5.333 h1.2 r90
  text "PA7" at 38.042,5.333 h1.2 r90
  text "PA6" at 40.587,5.333 h1.2 r90
  text "PA5" at 43.125,5.333 h1.2 r90
  text "PA4" at 45.667,5.333 h1.2 r90
  text "PA3" at 48.212,5.333 h1.2 r90
  text "PA2" at 50.754,5.333 h1.2 r90
  text "PA1" at 53.295,5.333 h1.2 r90
  text "PA0" at 55.837,5.333 h1.2 r90
  text "GND" at 58.389,5.333 h1.2 r90
  text "<- / 5V" at 0.254,0.762 h1.2
  text "-> / 3.3V" at 9.017,0.762 h1.2
Bottom Overlay:
  text "RISC-V" at 19.86,19.304 h4
Document:
  lines w0.15: 0.254,0.254 67.056,0.254 67.056,28.956 0.254,28.956 0.254,0.254

## Text inside footprints (layer, text, board x,y; h text height)
J2: Document "J1" at 36.039,25.001 h1.2 r57